# EAGLE board LKS2024_ESP_ACController v156 (EAGLE 9.7.0)
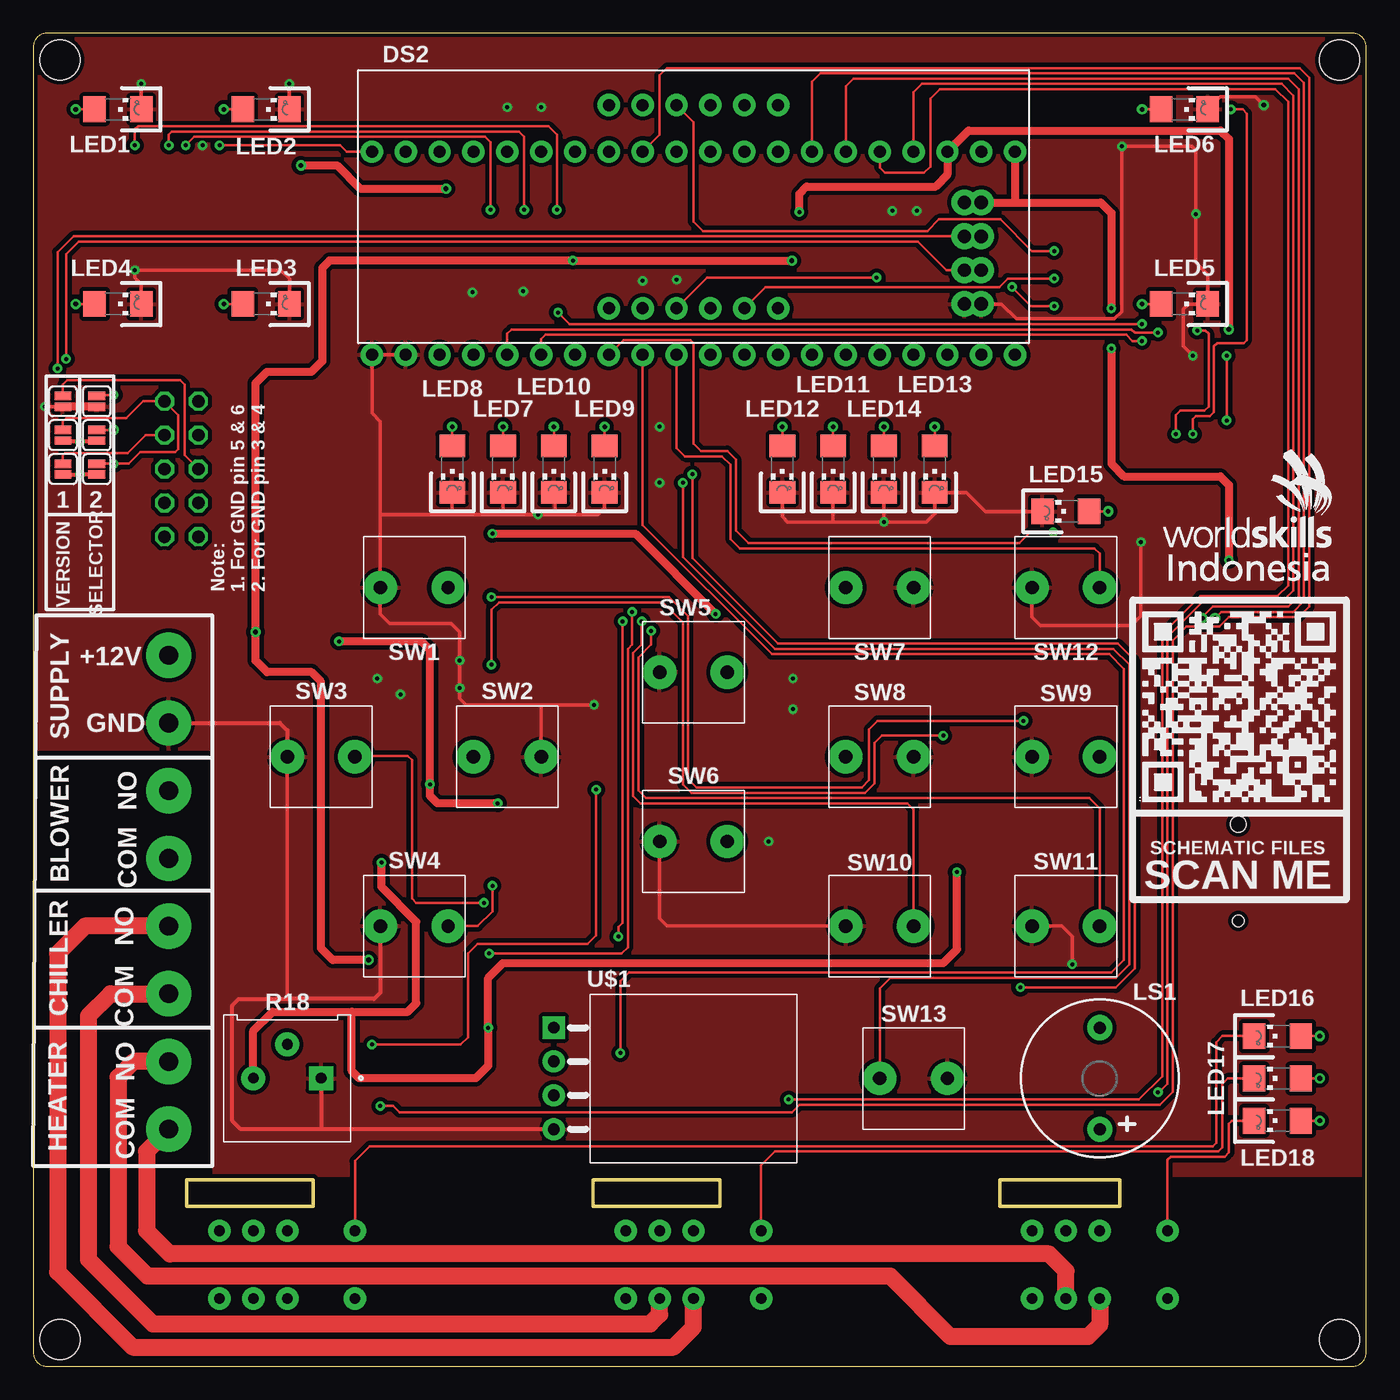
[diagram p0: board, top side]
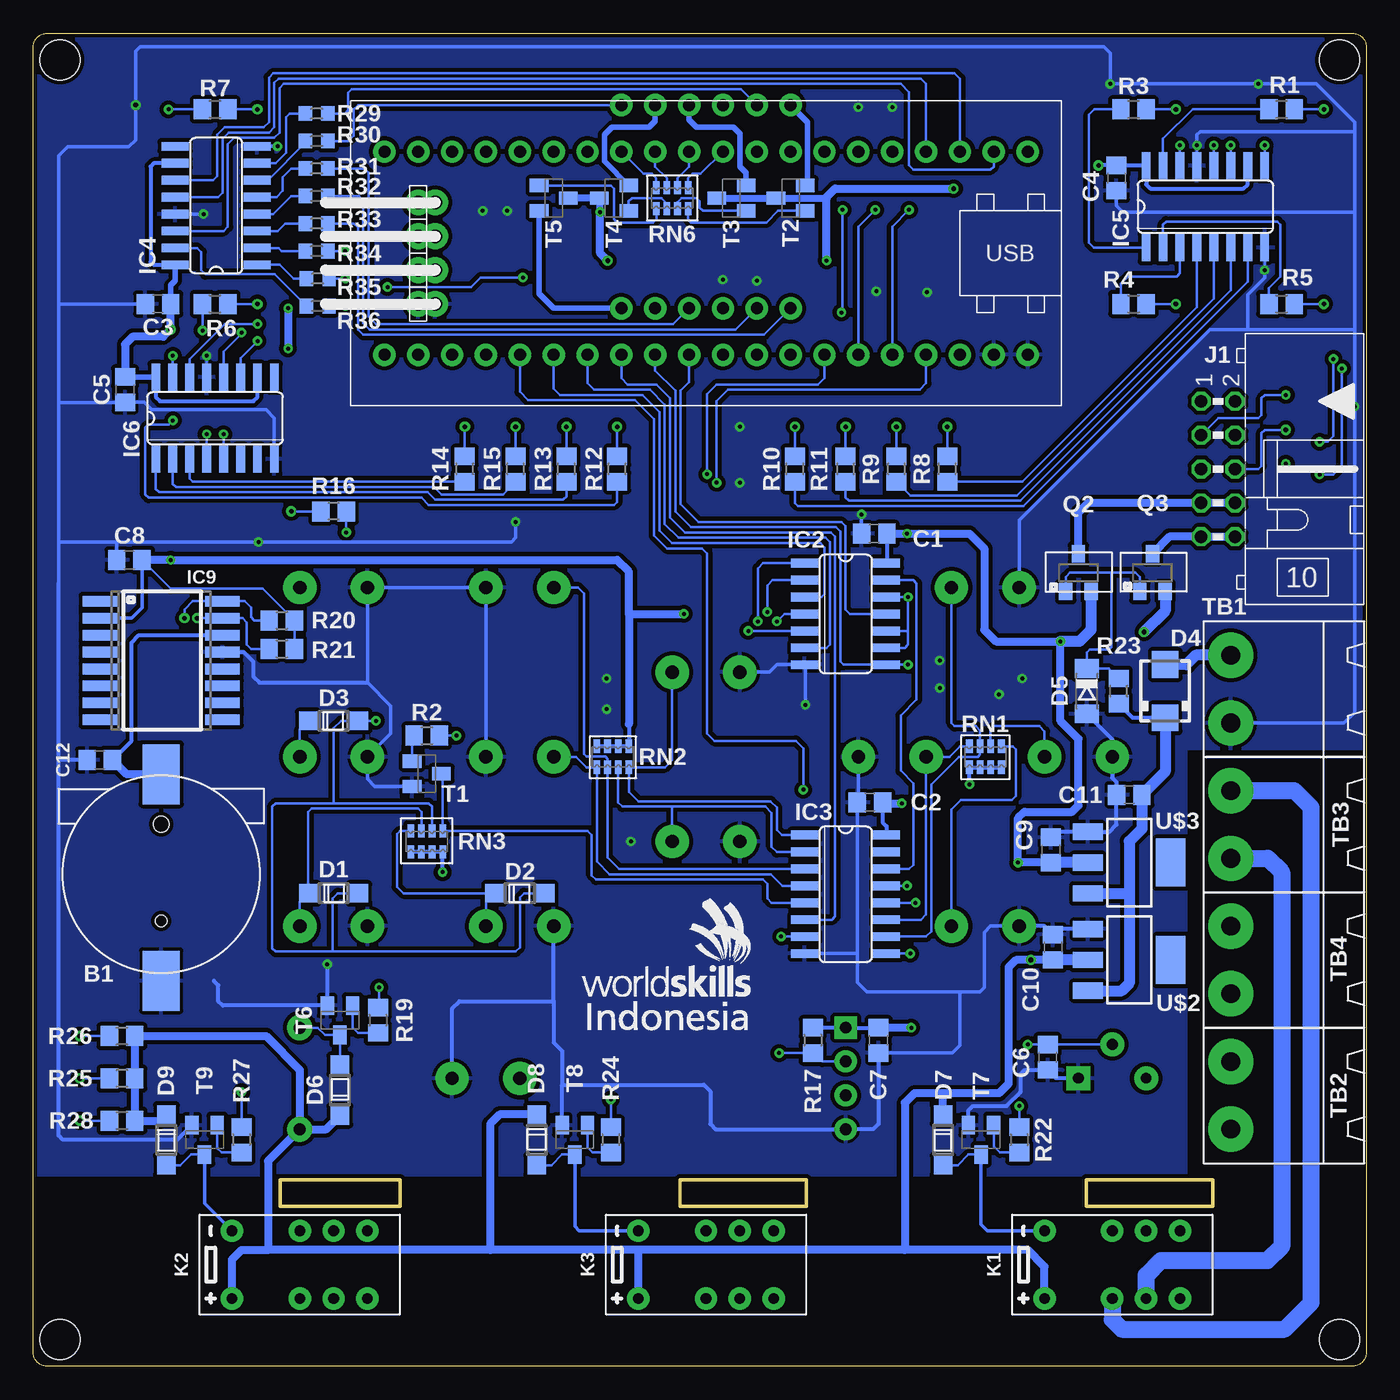
[diagram p1: board, bottom side, seen from below]

Size 100 x 100 mm. Coordinates in mm from the lower left corner, seen from the top.
Outline: 99,100 1,100 arc90 0,99 0,1 arc90 1,0 99,0 arc90 100,1 100,99 arc90 99,100
Outline: 72.5,12 72.5,14 81.5,14 81.5,12 72.5,12
Outline: 42,12 42,14 51.5,14 51.5,12 42,12
Outline: 11.5,12 11.5,14 21,14 21,12 11.5,12
Copper layers (1*16): Top 0.035mm / dielectric 1.5mm / Bottom 0.035mm
Design rules "default *": minimum track width 6mil, minimum drill 0.3mm, track to track 6mil, track to pad 6mil, pad to pad 6mil, via to via 6mil, smd to smd 6mil, copper to edge 6mil, drill to drill 6mil, minimum pad ring 10mil, minimum via ring 8mil, stop-mask expansion 4mil, vias tented up to drill 14mil, thermal gap 10mil
Holes 3 mm at 2,98 98,2 2,2 98,98

## Footprints (pad centres in the part's own frame; a part is rotated, then mirrored left to right if it is on the bottom)
CR1220 = smd 4.5 x 2.8: + 7.5,0; - -8,0 | hole 0.9: -3.5,0 | hole 1.2: 3.75,0
C0805 = smd 1.3 x 1.5: 1 -0.95,0; 2 0.95,0
SOD123 = smd 1.4 x 1.4: A 1.9,0; C -1.9,0
SMA = smd 2 x 2: A 2,0; C -2,0
SOD80C = smd 1.4 x 1.8: A 1.7,0; C -1.7,0
5643 = drill 0.9 pad 1.676: 1 -6.35,-7.62; 2 -3.81,-7.62; 3 -1.27,-7.62; 4 1.27,-7.62; 5 3.81,-7.62; 6 6.35,-7.62; 7 6.35,7.62; 8 3.81,7.62; 9 1.27,7.62; 10 -1.27,7.62; 11 -3.81,7.62; 12 -6.35,7.62
STM32F103C8T6-MODULE-SYS = drill 0.9 pad 1.676: 3.3V_1 25.4,-7.62; 3.3V_2 -17.78,7.62; 5V 20.32,-7.62; GND_1 22.86,-7.62; GND_2 -20.32,7.62; GND_3 -22.86,7.62; PA_0 15.24,7.62; PA_1 12.7,7.62; PA_2 10.16,7.62; PA_3 7.62,7.62; PA_4 5.08,7.62; PA_5 2.54,7.62; PA_6 0,7.62; PA_7 -2.54,7.62; PA_8 -12.7,-7.62; PA_9 -10.16,-7.62; PA_10 -7.62,-7.62; PA_11 -5.08,-7.62; PA_12 -2.54,-7.62; PA_15 0,-7.62; PB_0 -5.08,7.62; PB_1 -7.62,7.62; PB_3 2.54,-7.62; PB_4 5.08,-7.62; PB_5 7.62,-7.62; PB_6 10.16,-7.62; PB_7 12.7,-7.62; PB_8 15.24,-7.62; PB_9 17.78,-7.62; PB_10 -10.16,7.62; PB_11 -12.7,7.62; PB_12 -22.86,-7.62; PB_13 -20.32,-7.62; PB_14 -17.78,-7.62; PB_15 -15.24,-7.62; PC_13 22.86,7.62; PC_14 20.32,7.62; PC_15 17.78,7.62; RESET -15.24,7.62; VB 25.4,7.62 | drill 1 pad 1.93: 3V3_1 22.86,-3.81; 3V3_3 21.59,-3.81; GND_4 21.59,3.81; GND_5 22.86,3.81; SWCLK 21.59,1.27; SWCLK1 22.86,1.27; SWDIO 21.59,-1.27; SWDIO1 22.86,-1.27
SO14 = smd 0.66 x 2.032: 1 -3.81,-3.073; 2 -2.54,-3.073; 3 -1.27,-3.073; 4 0,-3.073; 5 1.27,-3.073; 6 2.54,-3.073; 7 3.81,-3.073; 8 3.81,3.073; 9 2.54,3.073; 10 1.27,3.073; 11 0,3.073; 12 -1.27,3.073; 13 -2.54,3.073; 14 -3.81,3.073
SO16 = smd 0.66 x 2.032: 1 -4.445,-3.073; 2 -3.175,-3.073; 3 -1.905,-3.073; 4 -0.635,-3.073; 5 0.635,-3.073; 6 1.905,-3.073; 7 3.175,-3.073; 8 4.445,-3.073; 9 4.445,3.073; 10 3.175,3.073; 11 1.905,3.073; 12 0.635,3.073; 13 -0.635,3.073; 14 -1.905,3.073; 15 -3.175,3.073; 16 -4.445,3.073
SO16W = smd 0.8 x 2.6: 1 -4.445,-4.6; 2 -3.175,-4.6; 3 -1.905,-4.6; 4 -0.635,-4.6; 5 0.635,-4.6; 6 1.905,-4.6; 7 3.175,-4.6; 8 4.445,-4.6; 9 4.445,4.6; 10 3.175,4.6; 11 1.905,4.6; 12 0.635,4.6; 13 -0.635,4.6; 14 -1.905,4.6; 15 -3.175,4.6; 16 -4.445,4.6
ML10L = drill 0.914 octagon: 1 -5.08,-1.27; 2 -5.08,1.27; 3 -2.54,-1.27; 4 -2.54,1.27; 5 0,-1.27; 6 0,1.27; 7 2.54,-1.27; 8 2.54,1.27; 9 5.08,-1.27; 10 5.08,1.27
SMT-JUMPER_2_NC_PASTE_SILK = smd 0.635 x 1.27: 1 -0.406,0; 2 0.406,0
EC2 = drill 0.8 pad 1.676: 1 -2.54,5.08; 3 -2.54,0; 4 -2.54,-2.54; 5 -2.54,-5.08; 8 2.54,-5.08; 9 2.54,-2.54; 10 2.54,0; 12 2.54,5.08
CHIPLED_1206 = smd 1.93 x 1.676: A 0,-1.75; C 0,1.75
BUZZER-12MM-KIT = drill 0.9 pad 1.88: +\ 3.81,0; - -3.81,0
SOT23 = smd 1 x 1.3: 1 -0.95,-1.417; 2 0.95,-1.417; 3 0,1.417
R0805 = smd 1.3 x 1.5: 1 -0.95,0; 2 0.95,0
TRIM_3386P-1-101T = drill 0.8 pad 1.8 square: 1 -2.54,-0.015 | drill 0.8 pad 1.8: 2 0,-2.555; 3 2.54,-0.015
R0603 = smd 1 x 1.1: 1 -0.85,0; 2 0.85,0
0603-ARC = smd 0.5 x 1: 1 -1.2,-0.784; 2 -0.4,-0.784; 3 0.4,-0.784; 4 1.2,-0.784; 5 1.2,0.784; 6 0.4,0.784; 7 -0.4,0.784; 8 -1.2,0.784
PUSH_BUTTON_2P = drill 1 pad 2.5: 1 -2.54,0; 2 2.54,0
SOT23-BEC = smd 1 x 1.4: B -0.95,-1.1; C 0,1.1; E 0.95,-1.1
MSTBA2 = drill 1.4 pad 3.4: 1 -2.54,5.08; 2 2.54,5.08
DHT11 = drill 0.889 pad 1.651 square: 1 -3.81,-0.003 | drill 0.889 pad 1.651: 2 -1.27,-0.003; 3 1.27,-0.003; 4 3.81,-0.003
SOT223 = smd 1.219 x 2.235: 1 -2.311,-3.099; 2 0,-3.099; 3 2.311,-3.099 | smd 3.6 x 2.2: 4 0,3.099

## Placement (x,y rotation side)
B1  CR1220  [CR1220]  90.41,36.91 90 bottom
C1  100n  [C0805]  36.91,62.47 180 bottom
C2  100n  [C0805]  37.23,42.31 180 bottom
C3  100n  [C0805]  90.65,79.69 180 bottom
C4  100n  [C0805]  18.73,89.14 270 bottom
C5  100n  [C0805]  93.11,73.26 270 bottom
C6  100n  [C0805]  23.89,23.18 270 bottom
C7  100n  [C0805]  36.59,24.45 270 bottom
C8  100n  [C0805]  92.79,60.48 180 bottom
C9  100n  [C0805]  23.65,38.73 90 bottom
C10  100n  [C0805]  23.5,31.43 90 bottom
C11  100n  [C0805]  17.78,42.86 180 bottom
C12  100n  [C0805]  95.01,45.48 180 bottom
D1  1N4148T4  [SOD123]  77.47,35.48 0 bottom
D2  1N4148T4  [SOD123]  63.5,35.48 0 bottom
D3  1N4148T4  [SOD123]  77.47,48.42 0 bottom
D4  SS34  [SMA]  15.08,50.64 90 bottom
D5  5V1  [SOD80C]  20.95,50.64 270 bottom
D6  1N4148T4  [SOD123]  76.99,20.72 90 bottom
D7  1N4148T4  [SOD123]  31.75,16.99 270 bottom
D8  1N4148T4  [SOD123]  62.23,16.99 270 bottom
D9  1N4148T4  [SOD123]  90.01,16.99 270 bottom
DS2  7SEG-5463  [5643]  49.53,87 0 top
IC1  STM32F103C8T6-MODULE-SYS  [STM32F103C8T6-MODULE-SYS]  48.26,83.5 180 bottom
IC2  74LS08D  [SO14]  39.05,56.44 270 bottom
IC3  74LS148D  [SO16]  39.05,35.4 270 bottom
IC4  74HCT595D  [SO16]  86.28,87.07 90 bottom
IC5  74HCT595D  [SO16]  12.06,87 0 bottom
IC6  74HCT595D  [SO16]  86.36,71.12 0 bottom
IC9  DS3231"  [SO16W]  90.41,52.94 270 bottom
J1  [ML10L]  11.11,67.31 270 bottom
JP3  JUMPER-SMT_2_NC_PASTE_SILK  [SMT-JUMPER_2_NC_PASTE_SILK]  2.22,67.31 90 top
JP4  JUMPER-SMT_2_NC_PASTE_SILK  [SMT-JUMPER_2_NC_PASTE_SILK]  2.22,69.85 90 top
JP5  JUMPER-SMT_2_NC_PASTE_SILK  [SMT-JUMPER_2_NC_PASTE_SILK]  2.22,72.39 90 top
JP8  JUMPER-SMT_2_NC_PASTE_SILK  [SMT-JUMPER_2_NC_PASTE_SILK]  4.76,67.31 90 top
JP9  JUMPER-SMT_2_NC_PASTE_SILK  [SMT-JUMPER_2_NC_PASTE_SILK]  4.76,69.85 90 top
JP10  JUMPER-SMT_2_NC_PASTE_SILK  [SMT-JUMPER_2_NC_PASTE_SILK]  4.76,72.39 90 top
K1  EC2  [EC2]  19.05,7.62 90 bottom
K2  EC2  [EC2]  80.01,7.62 90 bottom
K3  EC2  [EC2]  49.53,7.62 90 bottom
LED1  GREEN  [CHIPLED_1206]  6.35,94.3 270 top
LED2  BLUE  [CHIPLED_1206]  17.46,94.3 270 top
LED3  RED  [CHIPLED_1206]  17.46,79.69 270 top
LED4  WHITE  [CHIPLED_1206]  6.35,79.69 270 top
LED5  WHITE  [CHIPLED_1206]  86.36,79.69 270 top
LED6  WHITE  [CHIPLED_1206]  86.36,94.3 270 top
LED7  GREEN  [CHIPLED_1206]  35.24,67.31 180 top
LED8  BLUE  [CHIPLED_1206]  31.43,67.31 180 top
LED9  GREEN  [CHIPLED_1206]  42.86,67.31 180 top
LED10  GREEN  [CHIPLED_1206]  39.05,67.31 180 top
LED11  GREEN  [CHIPLED_1206]  60.01,67.31 180 top
LED12  BLUE  [CHIPLED_1206]  56.2,67.31 180 top
LED13  GREEN  [CHIPLED_1206]  67.63,67.31 180 top
LED14  GREEN  [CHIPLED_1206]  63.82,67.31 180 top
LED15  GREEN  [CHIPLED_1206]  77.47,64.14 90 top
LED16  GREEN  [CHIPLED_1206]  93.34,24.77 90 top
LED17  GREEN  [CHIPLED_1206]  93.34,21.59 90 top
LED18  GREEN  [CHIPLED_1206]  93.34,18.41 90 top
LS1  BUZZER-PTH_KIT  [BUZZER-12MM-KIT]  80.01,21.59 270 top
Q2  AO3404  [SOT23]  21.59,59.53 0 bottom
Q3  AO3404  [SOT23]  16.03,59.53 0 bottom
R1  1k5  [R0805]  6.35,94.3 0 bottom
R2  1k  [R0805]  70.48,47.31 0 bottom
R3  1k5  [R0805]  17.46,94.3 0 bottom
R4  1k5  [R0805]  17.46,79.69 0 bottom
R5  1k5  [R0805]  6.35,79.69 0 bottom
R6  1k5  [R0805]  86.36,79.69 0 bottom
R7  1k5  [R0805]  86.36,94.3 0 bottom
R8  1k5  [R0805]  31.43,67.31 90 bottom
R9  1k5  [R0805]  35.24,67.31 90 bottom
R10  1k5  [R0805]  42.86,67.31 90 bottom
R11  1k5  [R0805]  39.05,67.31 90 bottom
R12  1k5  [R0805]  56.2,67.31 90 bottom
R13  1k5  [R0805]  60.01,67.31 90 bottom
R14  1k5  [R0805]  67.63,67.31 90 bottom
R15  1k5  [R0805]  63.82,67.31 90 bottom
R16  1k  [R0805]  77.47,64.14 180 bottom
R17  5k  [R0805]  41.51,24.45 270 bottom
R18  10k  [TRIM_3386P-1-101T]  19.05,21.59 180 top
R19  1k  [R0805]  74.14,25.96 270 bottom
R20  4k7  [R0805]  81.36,55.96 0 bottom
R21  4k7  [R0805]  81.36,53.82 0 bottom
R22  1k  [R0805]  26.04,16.99 270 bottom
R23  100k  [R0805]  18.57,50.64 90 bottom
R24  1k  [R0805]  56.67,16.99 270 bottom
R25  330  [R0805]  93.34,21.59 180 bottom
R26  330  [R0805]  93.34,24.77 180 bottom
R27  1k  [R0805]  84.38,16.99 270 bottom
R28  330  [R0805]  93.34,18.41 180 bottom
R29  75  [R0603]  78.74,93.98 0 bottom
R30  75  [R0603]  78.74,91.92 0 bottom
R31  75  [R0603]  78.74,89.85 0 bottom
R32  75  [R0603]  78.74,87.79 0 bottom
R33  75  [R0603]  78.74,85.72 0 bottom
R34  75  [R0603]  78.74,83.66 0 bottom
R35  75  [R0603]  78.66,81.6 0 bottom
R36  75  [R0603]  78.66,79.53 0 bottom
RN1  10k  [0603-ARC]  28.57,45.72 180 bottom
RN2  10k  [0603-ARC]  56.52,45.72 0 bottom
RN3  10k  [0603-ARC]  70.48,39.37 180 bottom
RN6  1k  [0603-ARC]  52.07,87.63 0 bottom
SW1  MODE  [PUSH_BUTTON_2P]  28.57,58.42 0 top
SW2  SPEED  [PUSH_BUTTON_2P]  35.56,45.72 180 top
SW3  SWEEP  [PUSH_BUTTON_2P]  21.59,45.72 0 top
SW4  TIMER  [PUSH_BUTTON_2P]  28.57,33.02 0 top
SW5  TEMP_UP  [PUSH_BUTTON_2P]  49.53,52.07 0 top
SW6  TEMP_DOWN  [PUSH_BUTTON_2P]  49.53,39.37 0 top
SW7  HEATING  [PUSH_BUTTON_2P]  63.5,58.42 180 top
SW8  F_COOL  [PUSH_BUTTON_2P]  63.5,45.72 180 top
SW9  F_HEAT  [PUSH_BUTTON_2P]  77.47,45.72 0 top
SW10  C/F  [PUSH_BUTTON_2P]  63.5,33.02 0 top
SW11  SET  [PUSH_BUTTON_2P]  77.47,33.02 0 top
SW12  ON/OFF  [PUSH_BUTTON_2P]  77.47,58.42 0 top
SW13  RST  [PUSH_BUTTON_2P]  66.04,21.59 180 top
T1  MMBT3904  [SOT23-BEC]  70.48,44.45 270 bottom
T2  MMBT3904  [SOT23-BEC]  43.18,87.63 90 bottom
T3  MMBT3904  [SOT23-BEC]  47.62,87.63 90 bottom
T4  MMBT3904  [SOT23-BEC]  56.44,87.63 90 bottom
T5  MMBT3904  [SOT23-BEC]  60.96,87.63 270 bottom
T6  MMBT3904  [SOT23-BEC]  76.99,25.96 180 bottom
T7  MMBT3904  [SOT23-BEC]  28.89,16.99 180 bottom
T8  MMBT3904  [SOT23-BEC]  59.37,16.99 180 bottom
T9  MMBT3904  [SOT23-BEC]  87.15,16.99 180 bottom
TB1  SUPPLY  [MSTBA2]  5.08,50.8 90 bottom
TB2  HEATER  [MSTBA2]  5.08,20.32 90 bottom
TB3  BLOWER  [MSTBA2]  5.08,40.64 90 bottom
TB4  CHILLER  [MSTBA2]  5.08,30.48 90 bottom
U$1  DHT11  [DHT11]  39.05,21.59 270 top
U$2  5V  [SOT223]  17.78,30.48 270 bottom
U$3  3V3  [SOT223]  17.78,37.78 270 bottom

## Library data of the parts
B1 J1 = Khoirul-Connector
C1-C12 = Khoirul-RCL; SPICEPREFIX: C
D1-D3 D5-D9 = Khoirul-Diode
D4 IC9 K1-K3 LED1-LED18 Q2 Q3 SW1-SW13 T1-T9 U$1 = Khoirul-Component
DS2 = Khoirul-Display
IC1 = Khoirul-diy-module
IC2 IC3 = 74xx-us
IC4-IC6 = Khoirul-Component; CATEGORY: IC_Logic; SUB-CATEGORY: Shift Register
JP3-JP5 JP8-JP10 = SparkFun-Jumpers
LS1 = Khoirul-Component; PROD_ID: COMP-08253; SF_SKU: COM-07950
R1-R17 R19-R36 = Khoirul-RCL; SPICEPREFIX: R
R18 = Khoirul-Component; AVAILABILITY: In Stock; CHECK_PRICES: https://www.snapeda.com/parts/3386P-1-101/Bourns/view-part/?ref=eda; DESCRIPTION: TRIMMER - 3/8in SQ ST CERMET | Bourns 3386P-1-101; MF: Bourns; MP: 3386P-1-101; PACKAGE: 3386P-3 Bourns; PRICE: None; SNAPEDA_LINK: https://www.snapeda.com/parts/3386P-1-101/Bourns/view-part/?ref=snap
RN1-RN3 RN6 = Khoirul-Component; OC_FARNELL: unknown; OC_NEWARK: unknown
TB1-TB4 = 000_LibraryUtama
U$2 U$3 = SparkFun-IC-Power; PROD_ID: VREG-13917

## Nets
!RST: IC1.RESET SW13.2
+3V3: C1.1 C2.1 C7.1 C8.1 C9.1 IC1.3.3V_1 IC1.3V3_1 IC1.3V3_3 IC2.14 IC3.16 IC9.2 Q2.2 R17.1 R18.3 R20.2 R21.2 RN1.5 RN1.6 RN1.7 RN1.8 RN2.5 RN2.6 RN2.7 RN2.8 RN3.5 RN3.6 RN3.7 RN3.8 U$1.1 U$3.2
+5V: C3.1 C4.1 C5.1 C10.1 D6.C D7.C D8.C D9.C IC1.5V IC4.10 IC4.16 IC5.10 IC5.16 IC6.10 IC6.16 K1.1 K2.1 K3.1 LS1.+\ Q3.2 R25.1 R26.1 R28.1 T2.C T3.C T4.C T5.C U$2.2
ADC0: C6.1 IC1.PA_0 R18.2
BUZZER: IC1.PB_1 R19.1
DHT_11: IC1.PA_7 R17.2 U$1.2
GND: B1.- C1.2 C2.2 C3.2 C4.2 C5.2 C6.2 C7.2 C8.2 C9.2 C10.2 C11.2 C12.2 D5.A IC1.GND_2 IC1.GND_3 IC1.GND_4 IC1.GND_5 IC2.7 IC3.8 IC4.8 IC4.13 IC5.8 IC5.13 IC6.8 IC6.13 IC9.13 JP5.1 JP10.1 LED1.C LED2.C LED3.C LED4.C LED5.C LED6.C LED7.C LED8.C LED9.C LED10.C LED11.C LED12.C LED13.C LED14.C LED15.C R18.1 SW1.1 SW2.1 SW3.1 SW4.1 SW5.1 SW6.1 SW7.1 SW8.1 SW9.1 SW10.1 SW11.1 SW12.1 SW13.1 T1.E T6.E T7.E T8.E T9.E TB1.1 U$1.4 U$2.1 U$3.1
I2C1_SCL: IC1.PB_6 IC9.16 R20.1
I2C1_SDA: IC1.PB_7 IC9.15 R21.1
LED_POWER: IC1.PB_0 R16.1
MODE_AUTO: IC5.15 R1.1
MODE_COOL: IC5.1 R3.1
MODE_DRY: IC5.2 R5.1
MODE_HEAT: IC5.3 R4.1
N$1: IC2.2 IC3.9
N$2: IC2.4 IC3.7
N$3: IC2.13 IC3.14
N$4: D1.A D2.A D3.A IC2.9 IC2.10 IC2.12 RN3.2
N$5: IC3.10 RN1.3 SW1.2
N$6: IC3.11 RN1.4 SW2.2
N$7: IC3.12 RN1.2 SW3.2
N$8: IC3.13 RN1.1 SW4.2
N$9: IC3.1 RN2.4 SW5.2
N$10: IC3.2 RN2.3 SW6.2
N$11: IC3.3 RN2.2 SW7.2
N$12: IC3.4 RN2.1 SW8.2
N$13: D3.C SW9.2
N$14: D2.C IC2.1 RN3.4 SW10.2
N$15: D1.C IC2.5 RN3.3 SW11.2
N$17: R2.1 T1.B
N$18: DS2.12 T2.E
N$19: DS2.11 R29.2
N$20: DS2.7 R30.2
N$21: DS2.4 R31.2
N$22: DS2.2 R32.2
N$23: DS2.1 R33.2
N$24: DS2.10 R34.2
N$25: DS2.5 R35.2
N$26: DS2.3 R36.2
N$27: RN6.4 T2.B
N$28: DS2.9 T3.E
N$29: DS2.8 T4.E
N$30: DS2.6 T5.E
N$31: RN6.3 T3.B
N$32: RN6.2 T4.B
N$33: RN6.1 T5.B
N$34: IC5.9 IC6.14
N$35: LED1.A R1.2
N$36: LED2.A R3.2
N$37: LED3.A R4.2
N$38: LED4.A R5.2
N$39: LED5.A R6.2
N$40: LED6.A R7.2
N$41: LED8.A R8.2
N$42: LED7.A R9.2
N$43: LED9.A R10.2
N$44: LED10.A R11.2
N$45: LED12.A R12.2
N$46: LED11.A R13.2
N$47: LED13.A R14.2
N$48: LED14.A R15.2
N$49: LED15.A R16.2
N$50: D6.A LS1.- T6.C
N$51: R19.2 T6.B
N$52: B1.+ C12.1 IC9.14
N$54: D4.A TB1.2
N$55: D5.C Q2.1 Q3.1 R23.2
N$57: D7.A K1.12 LED16.C T7.C
N$58: R22.2 T7.B
N$59: D8.A K3.12 LED17.C T8.C
N$60: R24.2 T8.B
N$61: LED17.A R25.2
N$62: K3.3 TB4.2
N$63: LED16.A R26.2
N$64: K1.3 TB3.2
N$65: K1.4 TB3.1
N$66: K3.4 TB4.1
N$67: D9.A K2.12 LED18.C T9.C
N$68: R27.2 T9.B
N$69: LED18.A R28.2
N$70: K2.3 TB2.2
N$71: K2.4 TB2.1
OUT_CLOCK: IC1.PB_10 IC5.11 IC6.11
OUT_DATA: IC1.PB_12 IC5.14
OUT_LATCH: IC1.PB_11 IC5.12 IC6.12
PIN_1: J1.1
PIN_2: J1.2 JP4.2 JP8.2
PIN_3: J1.3 JP10.2
PIN_4: J1.4 JP3.2
PIN_5: J1.5 JP5.2
PIN_6: J1.6 JP9.2
RELAY_COOL: IC1.PB_8 R24.1
RELAY_FAN: IC1.PA_12 R22.1
RELAY_HEAT: IC1.PB_9 R27.1
SEG_A: IC4.7 R29.1
SEG_B: IC4.6 R30.1
SEG_C: IC4.5 R31.1
SEG_CLOCK: IC1.PB_14 IC4.11
SEG_D: IC4.4 R32.1
SEG_DATA: IC1.PB_13 IC4.14
SEG_DIG1: IC1.PA_15 RN6.5
SEG_DIG2: IC1.PB_3 RN6.6
SEG_DIG3: IC1.PB_4 RN6.7
SEG_DIG4: IC1.PB_5 RN6.8
SEG_DP: IC4.15 R36.1
SEG_E: IC4.3 R33.1
SEG_F: IC4.2 R34.1
SEG_G: IC4.1 R35.1
SEG_LATCH: IC1.PB_15 IC4.12
SPEED_AUTO: IC6.15 R12.1
SPEED_HIGH: IC6.3 R14.1
SPEED_LOW: IC6.1 R13.1
SPEED_MID: IC6.2 R15.1
STLINK_3V3: J1.7 J1.8 Q2.3
STLINK_5V: J1.9 J1.10 Q3.3
SW_B0: IC1.PA_1 IC2.3
SW_B1: IC1.PA_2 IC2.6
SW_B2: IC1.PA_3 IC3.6
SW_B3: IC1.PA_4 IC2.8 R2.2
SW_EN: IC3.5 RN3.1 T1.C
SW_GS: IC1.PA_5 IC2.11
SW_POWER: IC1.PA_6 SW12.2
SWCLK: IC1.SWCLK IC1.SWCLK1 JP4.1 JP9.1
SWDIO: IC1.SWDIO IC1.SWDIO1 JP3.1 JP8.1
SWING_AUTO: IC5.4 R8.1
SWING_DOWN: IC5.5 R9.1
SWING_MID: IC5.6 R11.1
SWING_TOP: IC5.7 R10.1
TIMER_OFF: IC6.5 R6.1
TIMER_ON: IC6.4 R7.1
VIN: C11.1 D4.C R23.1 U$2.3 U$3.3

## Tracks (layer width: path | path; a pad name or v marks a point on that pad's centre or on a via)
!RST  (via drill 0.3)
  Top 0.203: SW13.2 63.5,28.34 64.29,29.13 81.2,29.13 82.23,30.16 82.23,52.63 81.04,53.82 55.64,53.82 48.74,60.72 v48.74,66.28
  Bottom 0.203: v48.74,66.28 48.74,72.39 47.86,73.26 33.5,73.26 33.02,73.74 IC1.RESET
+3V3  (via drill 0.3)
  Top 0.61: IC1.3V3_3 IC1.3V3_1 73.66,87.31 | IC1.3.3V_1 73.66,87.31 | v34.85,42.23 30.32,42.23 29.77,42.78 v29.77,43.66 29.77,53.74 29.13,54.37 v22.94,54.37 | v69.29,37.07 69.29,31.27 68.26,30.24 35.24,30.24 34.13,29.13 v34.13,25.4 34.13,22.54 33.19,21.61 24.43,21.61 23.89,22.15 23.89,26.59 | v34.45,62.47 45.16,62.47 v51.2,56.44 | 73.66,87.31 80.09,87.31 80.88,86.52 v80.88,79.38 | v80.88,76.36 80.88,67.71 81.84,66.75 89.06,66.75 89.69,66.12 v89.69,60.48 | 23.89,26.59 17.94,26.59 16.51,25.16 R18.3 | 23.89,26.59 28.1,26.59 28.73,27.23 28.73,33.34 26.11,35.96 v26.11,37.78
  Bottom 0.203: R21.2 R20.2 82.79,58.34 89.7,58.34 C8.1
  Bottom 0.254: IC9.2 92.63,56.12 91.84,56.91 C8.1
  Bottom 0.305: R17.1 U$1.1 C7.1 | C1.1 35.96,60.27 IC2.14 | C2.1 36.28,40.8 35.98,40.5 IC3.16 | v29.77,43.66 29.77,44.93 RN1.5 RN1.6 RN1.7 RN1.8 | v69.29,37.07 v69.28,37.08 RN3.8 RN3.7 RN3.6 RN3.5 | 55.32,48.18 55.32,46.51 RN2.5 RN2.6 RN2.7 RN2.8
  Bottom 0.61: C9.1 v26.11,37.78 26.11,41.12 25.64,41.59 22.07,41.59 21.59,42.07 21.59,47.07 22.94,48.42 v22.94,54.37 27.78,54.37 28.65,55.24 28.65,61.36 29.77,62.47 v34.45,62.47 C1.1 | C2.1 36.2,42.23 v34.85,42.23 | v34.13,25.4 C7.1 | v80.88,79.38 v80.88,76.36 | 55.32,56.44 55.32,59.61 56.2,60.48 v89.69,60.48 C8.1 | 55.32,56.44 v51.2,56.44 | 55.32,56.44 55.32,48.18
  Bottom 0.813: U$3.2 C9.1 | Q2.2 20.64,55.24 21.51,54.37 v22.94,54.37
+5V  (via drill 0.3, 0.35)
  Top 0.61: v25.16,30.48 22.46,30.48 21.59,31.35 21.59,51.36 20.88,52.07 17.54,52.07 16.67,52.94 v16.67,55.09 16.67,73.74 17.54,74.61 20.88,74.61 21.67,75.41 21.67,82.39 22.23,82.95 v40.48,82.95 v56.91,82.95 | v57.47,86.6 57.47,87.95 58.02,88.5 67.71,88.5 68.58,89.38 IC1.5V 70.17,92.71 89.06,92.71 89.69,92.08 v89.69,77.79 | v20.08,90.09 22.78,90.09 24.53,88.34 v30.96,88.34
  Bottom 0.305: v20.08,90.09 C4.1 18.71,90.07 IC5.16 16.51,88.66 16.19,88.34 9.21,88.34 8.89,88.66 IC5.10 | IC4.10 90.96,90.25 91.2,90.01 91.2,82.87 90.96,82.63 IC4.16 | IC6.16 90.81,72.71 90.49,72.39 83.5,72.39 83.19,72.71 IC6.10
  Bottom 0.406: C3.1 89.7,81.12 89.35,81.46 IC4.16 | C5.1 93.03,74.21 90.83,74.21 IC6.16
  Bottom 0.508: v57.47,86.6 57.47,87.63 T4.C T5.C | T3.C T2.C 40.48,87.63
  Bottom 0.61: C10.1 v25.16,30.48 26.27,30.48 26.83,29.92 26.83,21.19 27.54,20.48 31.75,20.48 | 31.75,20.48 33.89,20.48 34.61,19.76 34.61,8.73 | 34.61,8.73 54.61,8.73 | 54.61,8.73 65.72,8.73 | 65.72,8.73 82.39,8.73 | LS1.+\ 82.39,15.4 82.39,8.73 | 82.39,8.73 84.38,8.73 85.09,8.02 K2.1 | 92.39,21.43 R25.1 R26.1 82.55,24.77 80.01,22.23 LS1.+\ | 92.39,21.43 R28.1 90.48,18.41 D9.C | 92.32,21.51 92.39,21.43 | D7.C 31.75,20.48 | D8.C 65.01,18.89 65.72,18.18 65.72,8.73 | v57.47,86.6 57.47,83.5 v56.91,82.95 | v30.96,88.34 39.85,88.34 40.48,87.71 40.48,87.63 v40.48,82.95 | C3.1 v89.69,77.79 90.25,77.23 92.55,77.23 93.11,76.68 93.11,74.29 93.03,74.21 | LS1.+\ 78.03,17.78 D6.C | K1.1 24.13,7.46 25.4,8.73 34.61,8.73 | K3.1 54.61,8.73
  Bottom 0.813: U$2.2 C10.1 | Q3.2 15.08,56.67 v16.67,55.09
ADC0  (via drill 0.3)
  Top 0.203: v42.23,43.26 42.23,32.31 41.59,31.67 33.34,31.67 32.62,30.96 32.62,24.69 32.07,24.13 v25.4,24.13
  Bottom 0.203: R18.2 19.07,24.13 C6.1 v25.4,24.13 | IC1.PA_0 63.5,73.1 62.87,72.47 54.85,72.47 53.42,71.04 53.42,62.31 52.47,61.36 49.85,61.36 49.45,60.96 49.45,47.47 48.9,46.91 42.78,46.91 42.23,46.35 v42.23,43.26
BUZZER  (via drill 0.3)
  Top 0.203: v49.45,66.91 49.45,60.64 55.88,54.21 81.36,54.21 82.63,52.94 82.63,29.84 81.2,28.42 v74.06,28.42
  Bottom 0.203: IC1.PB_1 40.64,74.14 41.12,73.66 48.74,73.66 49.45,72.95 v49.45,66.91 | v74.06,28.42 74.06,26.98 R19.1
DHT_11  (via drill 0.3)
  Top 0.203: IC1.PA_7 45.72,63.1 55.4,53.42 80.72,53.42 81.84,52.31 81.84,30.48 80.88,29.53 44.69,29.53 44.05,28.89 v44.05,23.5
  Bottom 0.203: U$1.2 40.8,22.86 41.43,23.5 R17.2 v44.05,23.5
GND  (via drill 0.3, 0.35)
  Top 0.254: LED9.C 42.86,64.37 42.39,63.9 39.13,63.9 | 39.13,63.9 v37.86,63.9 35.24,63.9 | LED10.C 39.13,65.48 39.13,63.9 | 35.24,63.9 31.43,63.9 | 31.43,63.9 26.04,63.9 | 26.04,63.9 SW1.1 26.04,56.44 26.75,55.72 31.35,55.72 31.99,55.09 31.99,50.09 32.46,49.61 38.1,49.61 | LED7.C 35.24,63.9 | LED8.C 31.43,63.9 | JP5.1 2.21,71.99 v0.87,71.99 | LED4.C 8.1,81.2 7.62,81.68 v7.62,82.23 18.57,82.23 19.21,81.59 LED3.C | LED2.C v19.21,96.2 | v8.1,96.2 LED1.C | v87,75.8 86.28,76.52 86.28,79.3 86.68,79.69 LED5.C 88.11,81.91 87.23,82.79 v87.23,86.44 87.23,91.2 86.92,91.52 v81.68,91.52 81.68,79.14 81.12,78.58 73.74,78.58 72.63,79.69 IC1.GND_5 | LED12.C 56.2,63.74 56.59,63.34 60.01,63.34 | 60.01,63.34 v63.82,63.34 | v63.82,63.34 66.99,63.34 67.63,63.98 LED13.C 70.01,65.56 71.44,64.14 LED15.C | LED14.C v63.82,63.34 | LED11.C 60.01,63.34 | SW12.1 74.93,56.2 75.56,55.56 82.39,55.56 83.11,56.28 v83.11,61.83 | SW6.1 46.99,33.58 47.55,33.02 SW10.1 | v77.95,30.16 77.95,32.23 77.15,33.02 SW11.1 | SW3.1 19.05,27.54 | SW2.1 38.1,49.61 | v42.07,49.61 38.1,49.61 | IC1.GND_2 IC1.GND_3 25.4,71.52 26.04,70.88 26.04,63.9 | LED6.C 89.06,95.25 91.68,95.25 v92.31,94.61
  Top 0.305: U$1.4 21.59,17.78 | 21.59,17.78 15.56,17.78 14.92,18.41 14.92,27.07 15.4,27.54 19.05,27.54 25.56,27.54 26.04,28.02 SW4.1 | TB1.1 18.49,48.26 19.05,47.7 SW3.1 | R18.1 21.59,17.78
  Top 0.61: JP10.1 JP5.1
  Bottom 0.203: IC5.13 v12.7,91.6 | IC5.8 v7.62,82.23 | IC1.GND_4 IC1.GND_5 | IC6.13 v87,75.8
  Bottom 0.254: C4.2 18.73,87.07 18.26,86.6 0.87,86.6 | 0.87,86.6 0.87,92.63 | 0.87,92.63 0.87,93.34 3.73,96.2 v8.1,96.2 v19.21,96.2 19.21,98.5 19.68,98.98 92,98.98 92.31,98.66 v92.31,94.61 92.31,92 92.83,91.48 97.43,91.48 98.11,90.81 98.11,79.69 | 98.11,79.69 98.11,72.31 | 98.11,72.31 98.11,61.83 | 98.11,61.83 98.11,58.73 | v12.7,91.6 12.7,92.39 12.46,92.63 0.87,92.63 | 0.87,86.6 0.87,77.79 | 0.87,77.79 v0.87,71.99 0.87,49.05 1.67,48.26 TB1.1 | v7.62,82.23 7.62,81.68 8.89,80.41 8.89,77.79 | 0.87,77.79 8.89,77.79 | SW1.1 26.04,63.5 11.75,77.79 8.89,77.79 | C1.2 v37.86,63.9 | v81.68,91.52 IC4.8 | IC4.13 v87.23,86.44 | IC6.8 81.92,71.12 82.55,71.75 91.12,71.75 91.68,72.31 C5.2 98.11,72.31 | SW8.1 SW7.1 SW12.1 74.93,51.28 73.18,49.53 73.18,47.47 SW9.1 74.93,44.05 74.38,43.5 T1.E | 93.74,61.83 v83.11,61.83 64.14,61.83 63.82,62.15 v63.82,63.34 | 93.74,61.83 98.11,61.83 | C3.2 98.11,79.69 | SW2.1 38.1,42.38 C2.2 38.18,30.96 | C7.2 31.03,23.5 30.48,24.05 30.48,28.1 | 30.48,28.1 37.47,28.1 38.18,28.81 38.18,30.96 | IC3.8 38.18,30.96 | SW4.1 28.18,33.02 28.65,32.54 28.65,28.42 28.97,28.1 30.48,28.1 | SW5.1 44.77,52.07 44.21,52.63 IC2.7 42.07,52.57 v42.07,49.61 | C8.2 93.74,61.83
  Bottom 0.305: C9.2 23.25,40.09 U$3.1 19.28,40.09 18.73,40.64 C11.2 18.73,43.81 19.05,44.13 SW3.1 19.05,47.04 D5.A | U$2.1 23.09,32.79 C10.2 24.13,33.02 SW4.1 | T7.E 29.84,19.2 29.51,19.53 26.99,19.53 25.96,20.56 25.96,21.91 25.64,22.23 C6.2 23.27,21.61 R18.1 | C7.2 36.59,18.18 36.99,17.78 U$1.4 48.82,17.78 49.21,18.18 49.21,20.64 49.69,21.11 60.32,21.11 | T8.E 60.32,21.11 | T9.E 89.2,16.99 97.79,16.99 98.11,17.3 98.11,45.48 | 98.11,45.48 98.11,58.73 | T6.E | T6.E 85.79,27.06 86.12,27.38 86.12,28.57 86.46,28.91 | v77.95,30.16 T6.E | SW13.1 68.58,26.83 68.02,27.38 60.96,27.38 | 60.96,27.38 SW10.1 | 60.96,27.38 60.96,24.29 60.32,23.65 60.32,21.11 | C12.2 98.11,45.48 | IC9.13 84.22,53.58 83.5,52.86 83.5,51.75 83.03,51.28 74.93,51.28
  other vias: 64.45,86.68 66.28,86.68 32.94,80.57 45.72,81.44 48.26,81.52 38.1,94.46 35.56,94.46 46.99,70.48 46.99,66.28 56.99,51.59 56.99,49.29 36.75,80.64 55.17,39.37 25.8,51.59 27.54,50.4 31.99,52.94 31.99,50.88
  pour Top (isolate 0.305): 13.54,46.28 13.57,46.23 13.57,14.36 99.86,14.36 99.86,99.86 0.15,99.86 0.15,46.35 13.44,46.35 13.5,46.33
  pour Bottom (isolate 0.305): 13.54,46.28 13.57,46.23 13.57,14.36 99.86,14.36 99.86,99.86 0.15,99.86 0.15,46.35 13.44,46.35 13.5,46.33
I2C1_SCL  (via drill 0.35)
  Top 0.203: IC1.PB_6 58.42,96.36 59.05,97 94.61,97 95.33,96.28 95.33,57.39 94.54,56.59 89.14,56.59 v88.66,56.12
  Bottom 0.203: v88.66,56.12 88.66,56.75 88.03,57.39 IC9.16 84.14,57.39 83.66,56.91 83.66,56.2 83.42,55.96 R20.1
I2C1_SDA  (via drill 0.35)
  Top 0.203: IC1.PB_7 60.96,96.04 61.52,96.6 94.14,96.6 94.93,95.81 94.93,57.78 94.14,56.99 88.5,56.99 87.71,56.2 v87.71,56.12
  Bottom 0.203: v87.71,56.12 IC9.15 84.3,56.12 83.98,55.8 83.98,54.13 83.66,53.82 R21.1
LED_POWER  (via drill 0.3)
  Top 0.203: IC1.PB_0 44.29,76.99 49.29,76.99 49.53,76.76 49.53,69.22 50.09,68.66 52.07,68.66 52.7,68.02 52.7,62.71 53.66,61.75 73.98,61.75 74.77,62.55 v76.52,62.55
  Bottom 0.203: v76.52,62.55 R16.1
MODE_AUTO
  Bottom 0.203: IC5.15 15.24,92.08 13.02,94.3 R1.1
MODE_COOL
  Bottom 0.203: IC5.1 20.42,83.92 20.8,84.3 20.8,93.9 20.4,94.3 R3.1
MODE_DRY
  Bottom 0.203: IC5.2 15.24,85.65 15,85.88 6.67,85.88 6.43,85.65 6.43,81.76 7.3,80.89 R5.1
MODE_HEAT
  Bottom 0.203: IC5.3 13.97,81.99 14.21,81.76 17.86,81.76 18.41,81.2 R4.1
N$1  (via drill 0.3)
  Top 0.203: v44.93,56.59 44.93,54.13 44.61,53.82 44.61,31.43 44.13,30.96 v34.21,30.96
  Bottom 0.203: v34.21,30.96 IC3.9 | v44.93,56.59 44.93,58.58 44.53,58.98 IC2.2
N$2  (via drill 0.3)
  Top 0.203: v44.21,55.88 44.21,33.26 43.89,32.94 v43.89,32.23
  Bottom 0.203: IC3.7 v43.89,32.23 | v44.21,55.88 43.66,56.44 IC2.4
N$3
  Bottom 0.203: IC2.13 33.97,58.98 33.73,58.74 33.73,50.01 34.92,48.82 34.92,44.69 33.97,43.74 33.97,37.62 34.29,37.31 IC3.14
N$4  (via drill 0.3)
  Top 0.203: v34.37,57.71 47.7,57.71 49.13,56.28 49.13,44.05 49.77,43.42 62.15,43.42 62.71,43.97 62.71,47.78 63.34,48.42 v74.3,48.42
  Bottom 0.203: IC2.12 v34.37,57.71 34.37,55.17 | 34.37,55.17 34.37,54.13 34.61,53.9 IC2.9 | IC2.10 34.37,55.17 | RN3.2 70.08,41.99 70.33,42.23 77.47,42.23 | 77.47,42.23 81.84,42.23 82.07,41.99 82.07,31.35 81.84,31.11 77.55,31.11 | 77.55,31.11 63.82,31.11 63.5,31.43 63.5,35.16 63.18,35.48 D2.A | 77.55,31.11 77.55,35.08 77.15,35.48 D1.A | 77.47,42.23 77.47,47.86 76.92,48.42 D3.A v74.3,48.42
N$5
  Bottom 0.203: SW1.2 31.11,48.26 30.88,48.02 29.29,48.02 28.98,47.71 RN1.3 28.97,45.88 29.13,45.72 30.56,45.72 32.62,43.66 32.62,32.62 33.02,32.23 IC3.10
N$6
  Bottom 0.203: RN1.4 30.49,46.5 31.27,45.72 SW2.2 33.02,33.89 33.42,33.5 IC3.11
N$7  (via drill 0.3)
  Top 0.203: v33.81,34.77 28.73,34.77 28.42,35.08 28.42,45.48 28.1,45.8 24.21,45.8 SW3.2
  Bottom 0.203: SW3.2 24.13,47.62 24.53,48.02 27.86,48.02 28.18,47.7 RN1.2 | IC3.12 v33.81,34.77
N$8  (via drill 0.3)
  Top 0.203: SW4.2 33.34,33.02 34.45,34.13 v34.45,36.04
  Bottom 0.203: SW4.2 31.11,41.75 30.4,42.47 26.59,42.47 26.27,42.78 26.27,46.28 26.5,46.5 RN1.1 | v34.45,36.04 IC3.13
N$9
  Bottom 0.203: SW5.2 52.07,45.48 52.62,44.94 RN2.4 55.31,43.09 54.61,42.39 44.69,42.39 44.21,41.91 44.21,40.24 43.81,39.85 IC3.1
N$10
  Bottom 0.203: RN2.3 56.12,42.31 55.8,41.99 52.07,41.99 | 52.07,41.99 45.09,41.99 44.61,41.51 44.61,38.97 44.21,38.58 IC3.2 | SW6.2 52.07,41.99
N$11
  Bottom 0.203: SW7.2 59.13,58.42 58.7,57.98 58.7,45.92 58.51,45.73 57.07,45.73 56.91,45.57 RN2.2 56.91,38.18 56.04,37.31 IC3.3
N$12
  Bottom 0.203: IC3.4 43.79,36.04 44.67,36.91 56.75,36.91 57.71,37.86 57.71,43.66 57.72,43.67 RN2.1 58.51,44.94 59.29,45.72 SW8.2
N$13
  Bottom 0.203: SW9.2 80.01,47.78 D3.C
N$14  (via drill 0.3)
  Top 0.203: v45.64,55.88 45.64,54.13 45.01,53.5 45.01,42.78 45.56,42.23 65.56,42.23 66.04,41.75 SW10.2
  Bottom 0.203: SW10.2 66.04,34.84 D2.C 72.23,35.48 72.71,35.96 72.71,39.93 72.48,40.15 RN3.4 | v45.64,55.88 45.64,59.85 45.24,60.25 IC2.1
N$15  (via drill 0.3)
  Top 0.203: SW11.2 80.01,41.83 79.22,42.62 45.96,42.62 45.4,43.18 45.4,53.18 46.35,54.13 v46.35,55.17
  Bottom 0.203: SW11.2 80.01,34.84 D1.C 79.37,37.22 79.38,37.23 79.38,41.59 79.14,41.83 71.12,41.83 70.89,41.6 RN3.3 | v46.35,55.17 IC2.5
N$17
  Bottom 0.203: T1.B 71.58,47.16 R2.1
N$18
  Bottom 0.406: DS2.12 41.91,93.34 41.91,88.75 T2.E
N$19
  Bottom 0.203: DS2.11 46.91,95.81 76.12,95.81 76.38,95.54 76.38,94.22 76.62,93.98 R29.2
N$20
  Bottom 0.203: DS2.7 75.64,94.61 75.96,94.3 75.96,92.34 76.38,91.92 R30.2
N$21
  Bottom 0.203: DS2.4 51.99,78.18 74.3,78.18 74.85,78.74 74.85,89.53 75.17,89.85 R31.2
N$22
  Bottom 0.203: DS2.2 47.31,77.79 74.77,77.79 75.25,78.26 75.25,87.47 75.56,87.79 R32.2
N$23
  Bottom 0.203: DS2.1 45.16,77.39 75.25,77.39 75.64,77.79 75.64,85.41 75.96,85.72 R33.2
N$24  (via drill 0.3)
  Top 0.203: DS2.10 49.53,93.34 49.53,85.88 50.24,85.17 67.07,85.17 67.94,86.04 72.55,86.04 74.93,83.66 v76.6,83.66
  Bottom 0.203: R34.2 v76.6,83.66
N$25  (via drill 0.3)
  Top 0.203: DS2.5 54.93,80.96 72.47,80.96 73.1,81.6 v76.6,81.6
  Bottom 0.203: R35.2 v76.6,81.6
N$26  (via drill 0.3)
  Top 0.203: v63.26,81.68 50.56,81.68 DS2.3 | v76.6,79.53 74.85,79.53 v73.42,80.96
  Bottom 0.203: v63.26,81.68 66.44,81.68 67.15,80.96 v73.42,80.96 | R36.2 v76.6,79.53
N$27
  Bottom 0.203: T2.B 44.13,86.68 45.01,85.8 50.64,85.8 50.88,86.04 50.88,86.84 RN6.4
N$28
  Bottom 0.406: DS2.9 50.8,93.5 50.24,92.95 47.47,92.95 46.99,92.47 46.99,90 46.52,89.53 T3.E
N$29
  Bottom 0.406: DS2.8 53.34,93.42 53.82,92.95 56.59,92.95 57.15,92.39 57.15,90.41 57.16,90.41 T4.E
N$30
  Bottom 0.406: DS2.6 60.96,79.38 62.06,80.47 T5.E
N$31
  Bottom 0.203: RN6.3 51.67,87.32 51.36,87.63 50.24,87.63 50.01,87.39 50.01,86.92 49.77,86.68 T3.B
N$32
  Bottom 0.203: RN6.2 52.47,87.24 52.86,87.63 55.1,87.63 55.34,87.39 T4.B
N$33
  Bottom 0.203: RN6.1 53.26,86.84 53.26,86.04 53.5,85.8 56.2,85.8 56.44,86.04 56.44,88.34 56.67,88.58 T5.B
N$34  (via drill 0.3)
  Top 0.203: v83.19,78.18 40.24,78.18 v39.37,79.06 | v39.29,86.76 39.29,92.39 38.66,93.03 7.86,93.03 7.62,92.79 v7.62,91.6
  Bottom 0.203: IC6.14 88.27,75.56 85.65,78.18 v83.19,78.18 | v39.29,86.76 39.29,79.14 v39.37,79.06 | v7.62,91.6 IC5.9
N$35  (via drill 0.35)
  Top 0.203: LED1.A v3.17,94.3
  Bottom 0.203: v3.17,94.3 R1.2
N$36  (via drill 0.35)
  Top 0.203: v14.29,94.3 LED2.A
  Bottom 0.203: R3.2 v14.29,94.3
N$37  (via drill 0.35)
  Top 0.203: v14.29,79.69 LED3.A
  Bottom 0.203: R4.2 v14.29,79.69
N$38  (via drill 0.35)
  Top 0.203: LED4.A v3.17,79.69
  Bottom 0.203: v3.17,79.69 R5.2
N$39  (via drill 0.35)
  Top 0.203: LED5.A v83.19,79.69
  Bottom 0.203: v83.19,79.69 R6.2
N$40  (via drill 0.35)
  Top 0.203: v83.19,94.3 LED6.A
  Bottom 0.203: R7.2 v83.19,94.3
N$41  (via drill 0.35)
  Top 0.203: LED8.A v31.43,70.48
  Bottom 0.203: v31.43,70.48 R8.2
N$42  (via drill 0.35)
  Top 0.203: v35.24,70.48 LED7.A
  Bottom 0.203: R9.2 v35.24,70.48
N$43  (via drill 0.35)
  Top 0.203: v42.86,70.48 LED9.A
  Bottom 0.203: R10.2 v42.86,70.48
N$44  (via drill 0.35)
  Top 0.203: LED10.A v39.05,70.48
  Bottom 0.203: v39.05,70.48 R11.2
N$45  (via drill 0.35)
  Top 0.203: LED12.A v56.2,70.48
  Bottom 0.203: R12.2 v56.2,70.48
N$46  (via drill 0.35)
  Top 0.203: v60.01,70.48 LED11.A
  Bottom 0.203: v60.01,70.48 R13.2
N$47  (via drill 0.35)
  Top 0.203: v67.63,70.48 LED13.A
  Bottom 0.203: v67.63,70.48 R14.2
N$48  (via drill 0.35)
  Top 0.203: v63.82,70.48 LED14.A
  Bottom 0.203: v63.82,70.48 R15.2
N$49  (via drill 0.35)
  Top 0.203: v80.64,64.14 LED15.A
  Bottom 0.203: R16.2 v80.64,64.14
N$50
  Bottom 0.203: 77.01,24.84 T6.C | T6.C D6.A | T6.C 78.12,24.86 78.66,25.4 LS1.-
N$51
  Bottom 0.203: R19.2 75.65,25.01 76.04,25.4 T6.B
N$52
  Bottom 0.305: C12.1 92.63,46.91 92.63,54.29 92.08,54.85 IC9.14
  Bottom 0.61: B1.+ 92.99,44.41 C12.1
N$54
  Bottom 0.813: TB1.2 12.79,53.34 13.49,52.64 D4.A
N$55
  Bottom 0.203: R23.2 19.32,52.34 D5.C 20.95,53.53 20.73,53.75 19.35,53.75 19.13,53.98 19.13,59.53 | Q3.1 16.98,59.21 17.3,59.53 19.13,59.53 | 19.13,59.53 22.23,59.53 22.54,59.21 Q2.1
N$57
  Top 0.203: LED16.C 89.22,24.77 88.74,24.29 88.74,16.75 88.5,16.51 25.24,16.51 24.13,15.4 K1.12
  Bottom 0.203: D7.A 30.64,15.09 29.84,15.89 T7.C
  Bottom 0.254: T7.C 28.89,10.64 28.42,10.16 K1.12
N$58
  Bottom 0.203: R22.2 27.47,16.04 27.94,16.51 T7.B
N$59
  Top 0.203: LED17.C 89.61,21.59 89.22,21.19 89.22,16.43 88.9,16.11 55.64,16.11 54.61,15.08 K3.12
  Bottom 0.203: T8.C 60.31,15.89 61.11,15.09 D8.A
  Bottom 0.254: T8.C 59.37,10.48 59.05,10.16 K3.12
N$60
  Bottom 0.203: R24.2 58.03,16.04 58.42,16.43 T8.B
N$61  (via drill 0.35)
  Top 0.203: v96.52,21.59 LED17.A
  Bottom 0.203: R25.2 v96.52,21.59
N$62
  Top 1.27: TB4.2 3.89,33.02 1.83,30.96 1.83,7.06 7.46,1.43 48.02,1.43 49.53,2.94 K3.3
N$63  (via drill 0.35)
  Top 0.203: LED16.A v96.52,24.77
  Bottom 0.203: v96.52,24.77 R26.2
N$64
  Bottom 1.27: TB3.2 5.4,43.18 4.13,41.91 4.13,4.76 6.11,2.78 18.34,2.78 19.05,3.49 K1.3
N$65
  Bottom 1.27: TB3.1 7.38,38.1 6.35,37.07 6.35,8.97 7.38,7.94 15.4,7.94 16.51,6.83 K1.4
N$66
  Top 1.27: TB4.1 5.79,27.94 4.13,26.27 4.13,8.02 8.97,3.17 46.28,3.17 46.99,3.89 K3.4
N$67
  Top 0.203: K2.12 85.09,15.48 85.33,15.72 89.38,15.72 89.69,16.03 89.69,18.18 89.93,18.41 LED18.C
  Bottom 0.203: D9.A 88.97,15.09 88.17,15.89 T9.C
  Bottom 0.254: T9.C 87.15,12.22 K2.12
N$68
  Bottom 0.203: R27.2 85.89,16.04 86.2,16.35 T9.B
N$69  (via drill 0.35)
  Top 0.203: LED18.A v96.52,18.41
  Bottom 0.203: v96.52,18.41 R28.2
N$70
  Top 1.27: TB2.2 7.54,22.86 6.35,21.67 6.35,8.97 8.57,6.75 64.29,6.75 68.82,2.22 79.14,2.22 80.01,3.1 K2.3
N$71
  Top 1.27: TB2.1 8.49,16.11 8.49,10.16 10.24,8.41 76.2,8.41 77.47,7.14 K2.4
OUT_CLOCK  (via drill 0.3)
  Top 0.203: v36.83,86.76 36.83,92.23 36.43,92.63 10.4,92.63 10.16,92.39 v10.16,91.6 | v83.19,76.91 82.47,76.91 81.99,77.39 38.42,77.39 38.1,77.07 IC1.PB_10
  Bottom 0.203: v10.16,91.6 IC5.11 | IC1.PB_10 38.1,85.49 v36.83,86.76 | IC6.11 84.45,75.64 v83.19,76.91
OUT_DATA  (via drill 0.3)
  Top 0.203: v13.97,91.6 23.02,91.6 23.5,91.12 IC1.PB_12
  Bottom 0.203: IC5.14 v13.97,91.6
OUT_LATCH  (via drill 0.3)
  Top 0.203: v11.43,91.6 12.06,92.23 33.89,92.23 34.29,91.84 v34.29,86.76 | v84.38,77.55 82.63,77.55 82.39,77.79 35.88,77.79 35.56,77.47 IC1.PB_11
  Bottom 0.203: v11.43,91.6 IC5.12 | IC1.PB_11 35.56,85.49 v34.29,86.76 | IC6.12 85.72,76.12 84.38,77.47 v84.38,77.55
PIN_2  (via drill 0.3)
  Top 0.203: JP8.2 4.77,67.71 v6.03,67.71 7.14,67.71 8.02,68.58 10.64,68.58 10.87,68.82 10.87,71.36 J1.2 8.26,72.39 6.99,71.12 2.46,71.12 2.22,70.88 JP4.2
PIN_3  (via drill 0.3)
  Top 0.203: JP10.2 4.83,72.87 v6.03,72.87
  Bottom 0.203: J1.3 11.11,71.12 8.1,71.12 7.86,71.36 7.86,72.63 7.62,72.87 v6.03,72.87
PIN_4
  Top 0.203: J1.4 8.41,69.85 7.06,68.5 2.38,68.5 2.22,68.34 JP3.2
PIN_5
  Top 0.203: J1.5 11.35,68.34 11.35,73.66 11.03,73.98 2.54,73.98 2.22,73.66 JP5.2
PIN_6  (via drill 0.35)
  Top 0.203: JP9.2 4.77,70.25 v6.03,70.25
  Bottom 0.203: J1.6 8.1,67.31 7.86,67.55 7.86,70.01 7.62,70.25 v6.03,70.25
RELAY_COOL  (via drill 0.3)
  Top 0.203: v56.67,20 82.95,20 84.69,21.75 84.69,54.93 87.55,57.78 93.34,57.78 94.14,58.58 94.14,94.85 93.19,95.81 68.02,95.81 67.31,95.09 67.31,90.01 66.83,89.53 63.9,89.53 63.5,89.93 IC1.PB_8
  Bottom 0.203: v56.67,20 R24.1
RELAY_FAN  (via drill 0.3)
  Top 0.203: v26.04,19.53 26.99,19.53 27.46,19.05 56.91,19.05 57.47,19.61 84.51,19.61 85.49,20.58 85.49,54.45 86.52,55.48 88.98,55.48 89.69,56.2 94.93,56.2 95.73,56.99 95.73,96.68 95.01,97.39 47.55,97.39 46.99,96.84 46.99,92.39 IC1.PA_12
  Bottom 0.203: R22.1 v26.04,19.53
RELAY_HEAT  (via drill 0.3)
  Top 0.203: IC1.PB_9 66.04,95.57 66.67,96.2 93.66,96.2 94.54,95.33 94.54,58.18 93.74,57.39 87.79,57.39 85.09,54.69 85.09,21.19 84.45,20.56 v84.38,20.56
  Bottom 0.203: v84.38,20.56 R27.1
SEG_A
  Bottom 0.203: IC4.7 81.84,90.25 81.04,91.04 81.04,93.72 80.78,93.98 R29.1
SEG_B
  Bottom 0.203: R30.1 79.59,91.78 82.39,88.98 IC4.6
SEG_C
  Bottom 0.203: IC4.5 81.76,87.71 81.28,88.19 81.28,89.22 80.64,89.85 R31.1
SEG_CLOCK
  Bottom 0.203: IC4.11 86.52,88.98 86.2,89.3 86.2,92.39 85.65,92.95 82.71,92.95 82.31,93.34 82.31,96.68 81.99,97 30.88,97 30.48,96.6 IC1.PB_14
SEG_D
  Bottom 0.203: IC4.4 81.99,86.44 80.64,87.79 R32.1
SEG_DATA
  Bottom 0.203: IC4.14 85.72,85.17 85.41,85.49 85.41,91.68 84.93,92.15 81.92,92.15 81.52,92.55 81.52,95.89 81.2,96.2 34.92,96.2 34.29,95.57 34.29,90.09 33.97,89.77 28.18,89.77 27.94,90.01 IC1.PB_13
SEG_DIG1
  Bottom 0.203: RN6.5 50.87,89.15 50.56,89.46 49.93,89.46 IC1.PA_15
SEG_DIG2
  Bottom 0.203: RN6.6 51.67,89.14 50.8,90.01 IC1.PB_3
SEG_DIG3
  Bottom 0.203: RN6.7 52.47,89.14 53.34,90.01 IC1.PB_4
SEG_DIG4
  Bottom 0.203: RN6.8 53.27,89.15 53.58,89.46 54.21,89.46 IC1.PB_5
SEG_DP
  Bottom 0.203: IC4.15 87.71,83.9 87.39,83.58 87.39,82.23 87.07,81.92 81.89,81.92 R36.1
SEG_E
  Bottom 0.203: IC4.3 81.68,85.17 81.12,85.72 R33.1
SEG_F
  Bottom 0.203: R34.1 81.36,83.66 81.6,83.9 IC4.2
SEG_G
  Bottom 0.203: R35.1 80.49,81.6 81.52,82.63 IC4.1
SEG_LATCH
  Bottom 0.203: IC4.12 86.12,87.71 85.8,88.03 85.8,92.08 85.33,92.55 82.31,92.55 81.92,92.95 81.92,96.28 81.6,96.6 33.42,96.6 33.02,96.2 IC1.PB_15
SPEED_AUTO  (via drill 0.3)
  Top 0.203: v89.53,75.8 v89.53,70.96
  Bottom 0.203: R12.1 56.2,64.85 56.44,64.61 70.33,64.61 70.88,65.17 91.36,65.17 91.6,65.41 91.6,70.41 91.36,70.64 89.85,70.64 v89.53,70.96 | IC6.15 v89.53,75.8
SPEED_HIGH
  Bottom 0.203: R14.1 88.03,66.36 88.27,66.6 IC6.3
SPEED_LOW
  Bottom 0.203: R13.1 60.01,65.25 60.25,65.01 69.85,65.01 70.41,65.56 90.57,65.56 90.81,65.8 IC6.1
SPEED_MID
  Bottom 0.203: R15.1 64.77,65.41 69.37,65.41 69.93,65.96 89.3,65.96 89.53,66.2 IC6.2
STLINK_3V3
  Bottom 0.61: J1.8 J1.7 20.88,64.77 21.59,64.06 Q2.3
STLINK_5V
  Bottom 0.61: J1.10 J1.9 14.75,62.23 Q3.3
SW_B0
  Bottom 0.203: IC2.3 40.88,57.71 40.64,57.94 40.64,61.44 40.96,61.75 52.07,61.75 53.02,62.71 53.02,71.6 54.29,72.87 60.48,72.87 60.96,73.34 IC1.PA_1
SW_B1
  Bottom 0.203: IC1.PA_2 58.42,73.74 57.94,73.26 53.74,73.26 52.63,72.15 52.63,63.18 51.59,62.15 40.56,62.15 40.24,61.83 40.24,54.13 40.48,53.9 IC2.6
SW_B2
  Bottom 0.203: IC1.PA_3 55.88,74.14 55.4,73.66 53.26,73.66 52.23,72.63 52.23,63.66 51.12,62.55 40.16,62.55 39.85,62.23 39.85,33.73 40.08,33.5 IC3.6
SW_B3  (via drill 0.3)
  Top 0.203: v34.37,52.63 34.37,56.75 34.92,57.31 47.23,57.31 48.74,55.8 48.74,43.66 49.37,43.02 62.39,43.02 63.1,43.74 63.1,46.75 63.66,47.31 v68.26,47.31
  Bottom 0.203: IC1.PA_4 53.34,74.69 51.83,73.18 51.83,64.14 50.64,62.94 39.77,62.94 39.45,62.63 39.45,52.86 39.21,52.63 IC2.8 v34.37,52.63 | R2.2 v68.26,47.31
SW_EN
  Bottom 0.203: RN3.1 69.28,40.16 | 69.28,40.16 69.28,44.35 T1.C | IC3.5 44.61,34.77 44.93,35.08 44.93,36.2 45.24,36.51 57.78,36.51 58.1,36.83 58.1,39.85 58.42,40.16 69.28,40.16
SW_GS
  Bottom 0.203: IC2.11 38.73,56.44 39.05,56.75 39.05,63.02 39.37,63.34 50.09,63.34 51.44,64.69 51.44,73.18 50.8,73.82 IC1.PA_5
SW_POWER
  Top 0.203: SW12.2 80.01,60.96 79.61,61.36 53.02,61.36 52.31,62.07 52.31,67.63 51.67,68.26 48.9,68.26 48.26,68.9 IC1.PA_6
SWCLK  (via drill 0.3)
  Top 0.203: IC1.SWCLK 68.5,82.23 66.36,84.38 3.41,84.38 2.46,83.42 v2.46,75.56
  Top 0.305: JP9.1 4.68,69.36 v3.49,69.36 2.3,69.36 JP4.1
  Bottom 0.203: IC1.SWCLK IC1.SWCLK1 | v3.49,69.36 2.87,69.36 2.46,69.77 v2.46,75.56
SWDIO  (via drill 0.3)
  Top 0.203: IC1.SWDIO 3.02,84.77 1.83,83.58 v1.83,74.85
  Top 0.305: JP8.1 v3.49,66.9 JP3.1
  Bottom 0.203: IC1.SWDIO IC1.SWDIO1 | v3.49,66.9 2.47,66.9 1.83,67.55 v1.83,74.85
SWING_AUTO
  Bottom 0.203: IC5.4 12.7,79.45 25.79,66.36 R8.1
SWING_DOWN
  Bottom 0.203: R9.1 34.21,65.33 26.19,65.33 11.43,80.09 IC5.5
SWING_MID
  Bottom 0.203: IC5.6 10.16,80.72 25.96,64.93 38.81,64.93 39.05,65.17 R11.1
SWING_TOP
  Bottom 0.203: IC5.7 8.89,81.36 25.72,64.53 42.62,64.53 42.86,64.77 R10.1
TIMER_OFF  (via drill 0.3)
  Top 0.203: v87.31,77.71 87.95,77.71 88.19,77.47 88.19,71.99 87.87,71.68 86.04,71.68 85.72,71.36 v85.72,69.93
  Bottom 0.203: IC6.5 v85.72,69.93 | v87.31,77.71 R6.1
TIMER_ON  (via drill 0.3)
  Top 0.203: v89.85,94.3 90.73,94.3 91.04,93.98 91.04,76.99 90.81,76.76 88.82,76.76 88.58,76.52 88.58,71.6 88.27,71.28 87.23,71.28 87,71.04 v87,69.93
  Bottom 0.203: IC6.4 v87,69.93 | v89.85,94.3 R7.1
VIN
  Bottom 0.305: D4.C 17.52,48.64 R23.1
  Bottom 0.813: 17.78,35.48 17.78,39.37 16.83,40.32 C11.1 15.08,44.61 D4.C | 17.78,35.48 17.78,28.73 18.34,28.17 U$2.3 | U$3.3 17.79,35.47 17.78,35.48

## Text on the board
tPlace: 1 | 2 | VERSION | SELECTOR | Note: / 1. For GND pin 5 & 6 / 2. For GND pin 3 & 4 | +12V | SUPPLY | GND | NO | BLOWER | SCHEMATIC FILES | COM | SCAN ME | NO | CHILLER | COM | NO | HEATER | COM